# Altium PCB MotorDriver.PcbDoc
Units mm, origin at the board's own origin, x right, y up, seen from the top; angles counter-clockwise.
Board outline 100 x 90 mm, 2 copper layers (Top Layer, Bottom Layer); 3 components, 14 nets, 54 pads, 0 vias.
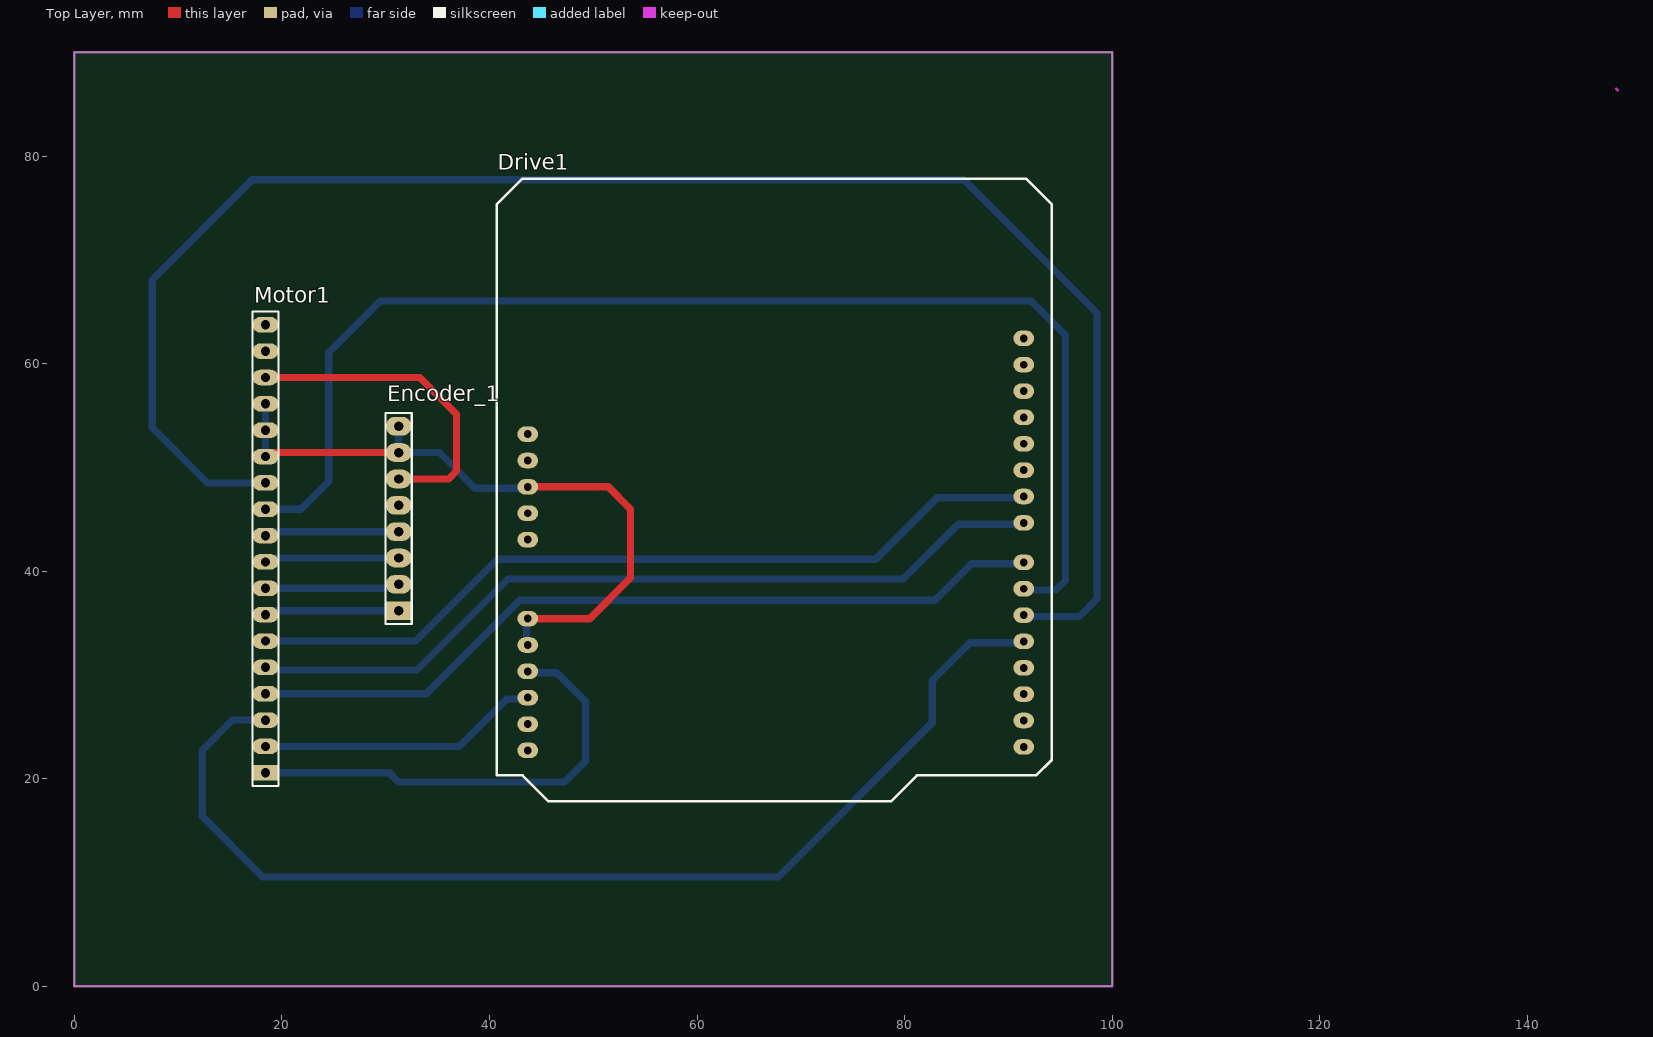
[diagram p0: Top Layer view]
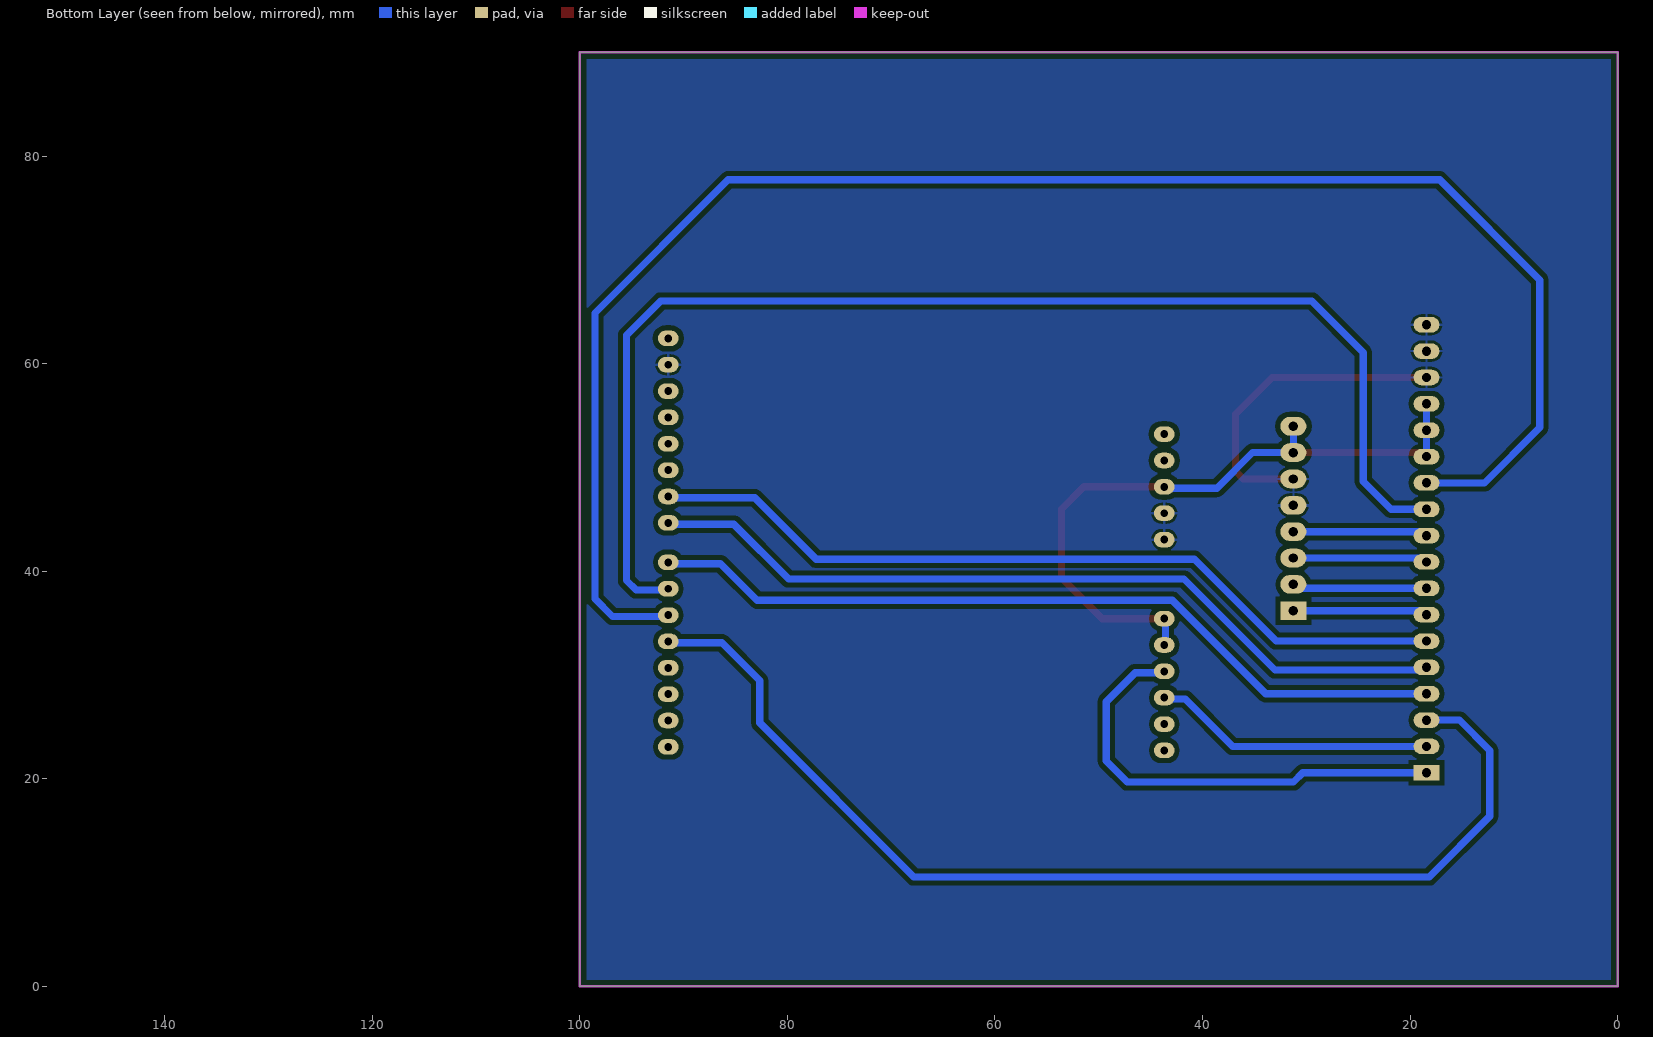
[diagram p1: Bottom Layer view, seen from below]

## Layer stack, top to bottom
Top Solder: solder mask 0.0102, Solder Resist, Dk 3.5
Top Layer: signal copper 0.0356
Dielectric 1: dielectric 0.32, FR-4, Dk 4.8
Bottom Layer: signal copper 0.0356
Bottom Solder: solder mask 0.0102, Solder Resist, Dk 3.5

## Board outline
0,0 0,90 100,90 100,0

## Design rules (kind name [scope] priority, off if disabled: settings)
Clearance [All] p1: gap=0.5 ignorepadtopadclearanceinfootprint=FALSE
PolygonConnect [All] p1: connectstyle=Relief reliefconductorwidth=0.254 reliefentries=4 polygonreliefangle="90 Angle" airgapwidth=0.254
RoutingVias [All] p1: holewidth=0.711 width=1.27 viastyle="Through Hole" minholewidth=0.711 minwidth=1.27 maxholewidth=0.711 maxwidth=1.27
SolderMaskExpansion [All] p1: expansion=0.102
Width [All] p1: maxlimit=0.7 minlimit=0.5 preferedwidth=0.7 minimp=50.000000 maximp=50.000000 favimp=50.000000
30 further rules are at their usual default settings.

## Components (designator, comment, footprint, x,y, rotation, side; value= is the part's Value field where it differs from the comment)
Drive1 "Component_1" PCBComponent_1 43.188,77.833 r0 top
Encoder_1 "Header 8" HDR1X8 31.242,36.195 r90 top
Motor1 "Header 18" HDR1X18 18.415,20.574 r90 top

## Footprints (in the part's own frame and the unit in brackets; to place one, negate y for a bottom-side part, rotate by r counter-clockwise, add the part's x,y. Pads: shape width x height; smd on the part's side, far side on the other; paste and mask are expansions set on the pad)
HDR1X8 [mm] "Connector; Header; 8 Position"
  rect 1.8x2.5 hole 0.9: 1(0,0)
  oval 1.8x2.5 hole 0.9: 2(2.54,0) 3(5.08,0) 4(7.62,0) 5(10.16,0) 6(12.7,0) 7(15.24,0) 8(17.78,0)
  silkscreen extent -1.27,-1.27 19.05,1.27
HDR1X18 [mm] "Connector; Header; 18 Position"
  rect 1.5x2.5 hole 0.9: 1(0,0)
  oval 1.5x2.5 hole 0.9: 2(2.54,0) 3(5.08,0) 4(7.62,0) 5(10.16,0) 6(12.7,0) 7(15.24,0) 8(17.78,0) 9(20.32,0) 10(22.86,0) 11(25.4,0) 12(27.94,0) 13(30.48,0) 14(33.02,0) 15(35.56,0) 16(38.1,0) 17(40.64,0) 18(43.18,0)
  silkscreen extent -1.27,-1.27 44.45,1.27
PCBComponent_1 [mm]
  oval 2x1.5 hole 0.762: 0Analog(0.5,-42.4) 1Analog(0.5,-44.94) 2(48.3,-49.68) 2Analog(0.5,-47.48) 3(48.3,-47.14) 3.3V(0.5,-27.16) 3Analog(0.5,-50.02) 4(48.3,-44.6) 4Analog(0.5,-52.56) 5(48.3,-42.06) 5Analog(0.5,-55.1) 5V(0.5,-29.7) 6(48.3,-39.52) 7(48.3,-36.98) 8(48.3,-33.17) 9(48.3,-30.63) 10(48.3,-28.09) 11(48.3,-25.55) 12(48.3,-23.01) 13(48.3,-20.47) AREF(48.3,-15.39) GND0(0.5,-34.78) GND1(0.5,-32.24) GND2(48.3,-17.93) RST(0.5,-24.62) RX(48.3,-54.76) TX(48.3,-52.22)
  round 0 all layers, no hole: Vin(0.5,-37.32)
  silkscreen extent -2.5,-60 51,0, body extent -2.35,-60.05 50.95,-0.15, height 10.9

## Part data
Encoder_1: "Header, 8-Pin", LatestRevisionDate=17-Jul-2002, LatestRevisionNote="Re-released for DXP Platform.", Publisher="Altium Limited"
Motor1: "Header, 18-Pin", LatestRevisionDate=17-Jul-2002, LatestRevisionNote="Re-released for DXP Platform.", Publisher="Altium Limited"

## Nets (pads, with @x,y where several pads share a name; then routed paths per layer and width w, separated by ;. In a path a pad name is that pad's centre, name@x,y a point inside that pad or via, vN(x,y) a via of type N, cw(c..) or ccw(c..) an arc to the next point about the centre after c; other vN are vias at no path point)
5: Drive1.0Analog Drive1.1Analog Drive1.5V Encoder_1.7 Encoder_1.8 Motor1.13 Motor1.14 Motor1.15 | length 65.8
  Top Layer w0.7: Motor1.13 18.796,51.435 Encoder_1.7 ; Drive1.0Analog 49.657,35.433 53.594,39.37 53.594,45.974 51.435,48.133 Drive1.5V
  Bottom Layer w0.7: Motor1.13 Motor1.14 Motor1.15 ; Encoder_1.8 Encoder_1.7 35.179,51.435 38.608,48.006 Drive1.5V@43.561,48.006 ; Drive1.1Analog@43.561,32.766 Drive1.0Analog@43.561,35.306
Current_sensor_1_1: Drive1.2Analog Motor1.1 | length 44.7
  Bottom Layer w0.7: Motor1.1 30.353,20.574 31.242,19.685 47.244,19.685 49.276,21.717 49.276,27.432 46.482,30.226 Drive1.2Analog@43.561,30.226
Current_sensor_1_2: Drive1.3Analog Motor1.2 | length 27
  Bottom Layer w0.7: Motor1.2 37.084,23.114 41.656,27.686 Drive1.3Analog@43.561,27.686
DRIVE_1_4: Drive1.4 Motor1.3 | length 106.8
  Bottom Layer w0.7: Motor1.3 15.24,25.654 12.319,22.733 12.319,16.383 18.161,10.541 67.818,10.541 82.677,25.4 82.677,29.464 86.319,33.106 Drive1.4@91.361,33.106
DRIVE_1_5: Drive1.5 Motor1.12 | length 163.2
  Bottom Layer w0.7: Motor1.12 12.827,48.514 7.493,53.848 7.493,68.072 17.145,77.724 85.725,77.724 98.552,64.897 98.552,37.338 96.86,35.646 Drive1.5@91.361,35.646
DRIVE_1_6: Drive1.6 Motor1.11 | length 122.2
  Bottom Layer w0.7: Motor1.11 21.844,45.974 24.511,48.641 24.511,61.087 29.464,66.04 92.202,66.04 95.504,62.738 95.504,39.116 94.574,38.186 Drive1.6@91.361,38.186
DRIVE_1_7: Drive1.7 Motor1.4 | length 78.1
  Bottom Layer w0.7: Motor1.4 33.909,28.194 42.926,37.211 82.931,37.211 86.446,40.726 Drive1.7@91.361,40.726
DRIVE_1_8: Drive1.8 Motor1.5 | length 78.9
  Bottom Layer w0.7: Motor1.5 18.669,30.48 33.02,30.48 41.783,39.243 45.339,39.243 79.883,39.243 85.176,44.536 Drive1.8@91.361,44.536
DRIVE_1_9: Drive1.9 Motor1.6 | length 78.7
  Bottom Layer w0.7: Motor1.6 32.893,33.274 40.767,41.148 77.216,41.148 83.144,47.076 Drive1.9@91.361,47.076
Encoder_1_DIG_1: Encoder_1.1 Motor1.7 | length 13
  Bottom Layer w0.7: Motor1.7 18.796,36.195 Encoder_1.1
Encoder_1_DIG_2: Encoder_1.2 Motor1.8 | length 13
  Bottom Layer w0.7: Motor1.8 30.861,38.354 Encoder_1.2
Encoder_1_INT_1: Encoder_1.4 Motor1.10 | length 13
  Bottom Layer w0.7: Motor1.10 18.796,43.815 Encoder_1.4
Encoder_1_INT_2: Encoder_1.3 Motor1.9 | length 13
  Bottom Layer w0.7: Motor1.9 18.796,41.275 Encoder_1.3
GND: Drive1.GND0 Drive1.GND1 Drive1.GND2 Encoder_1.5 Encoder_1.6 Motor1.16 Motor1.17 Motor1.18 | length 31.3
  Top Layer w0.7: Motor1.16 33.274,58.674 36.83,55.118 36.83,49.657 36.068,48.895 Encoder_1.6
pads on no net: Drive1.2 Drive1.3 Drive1.3.3V Drive1.4Analog Drive1.5Analog Drive1.10 Drive1.11 Drive1.12 Drive1.13 Drive1.AREF Drive1.RST Drive1.RX Drive1.TX Drive1.Vin

## Polygon pours and split planes (outlines as drawn)
GND on Bottom Layer "Bottom" (solid, pour order 2): 0,0 0,90 100,90 100,0

## Keep-outs
Top Layer:
  lines w0.254: 148.59,86.487 148.717,86.36
Keep-Out Layer:
  the board outline again, w0.254